# Altium PCB Dashboard_11_19.PcbDoc
Units mm, origin at the board's own origin, x right, y up, seen from the top; angles counter-clockwise.
Board outline 229.62 x 73.66 mm, 2 copper layers (Top Layer, Bottom Layer), stack 0.533 mm thick; 59 components, 48 nets, 205 pads, 36 vias.
Unrouted connection lines stored in the file: 11.
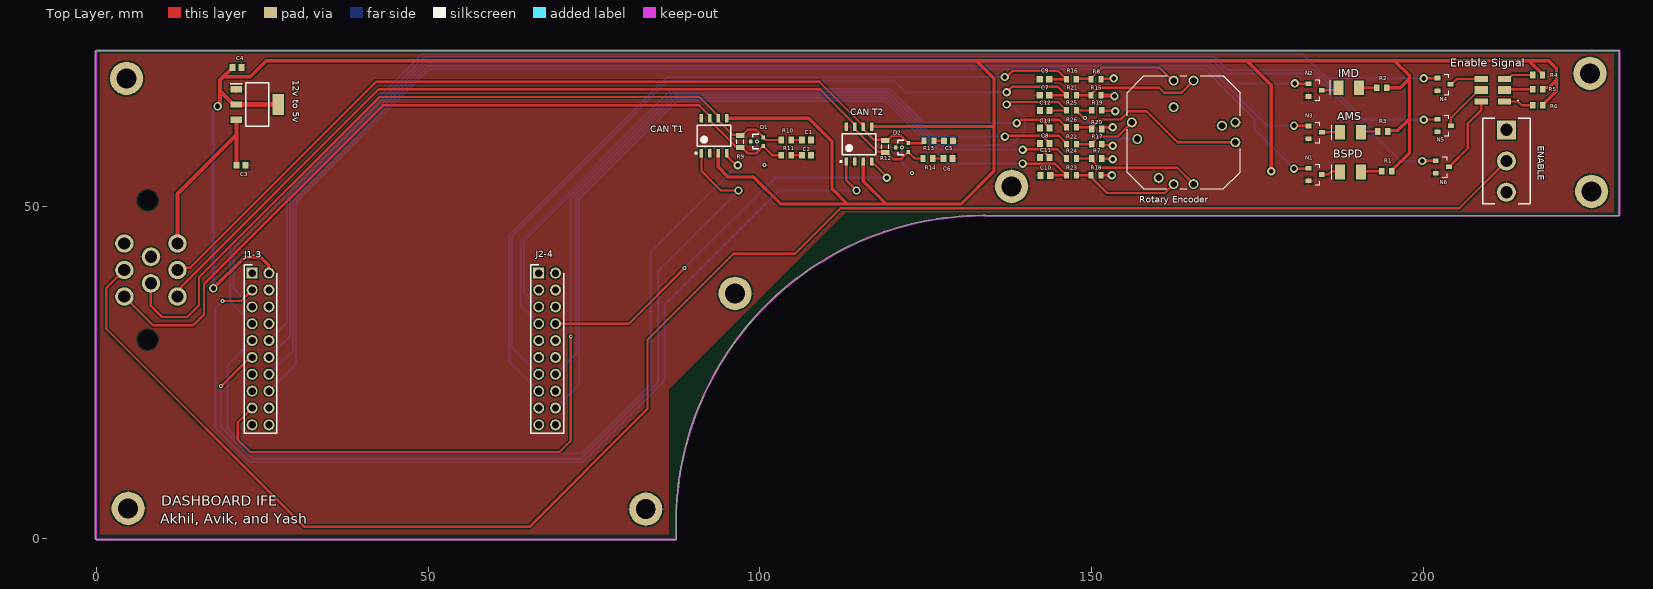
[diagram p0: Top Layer view]
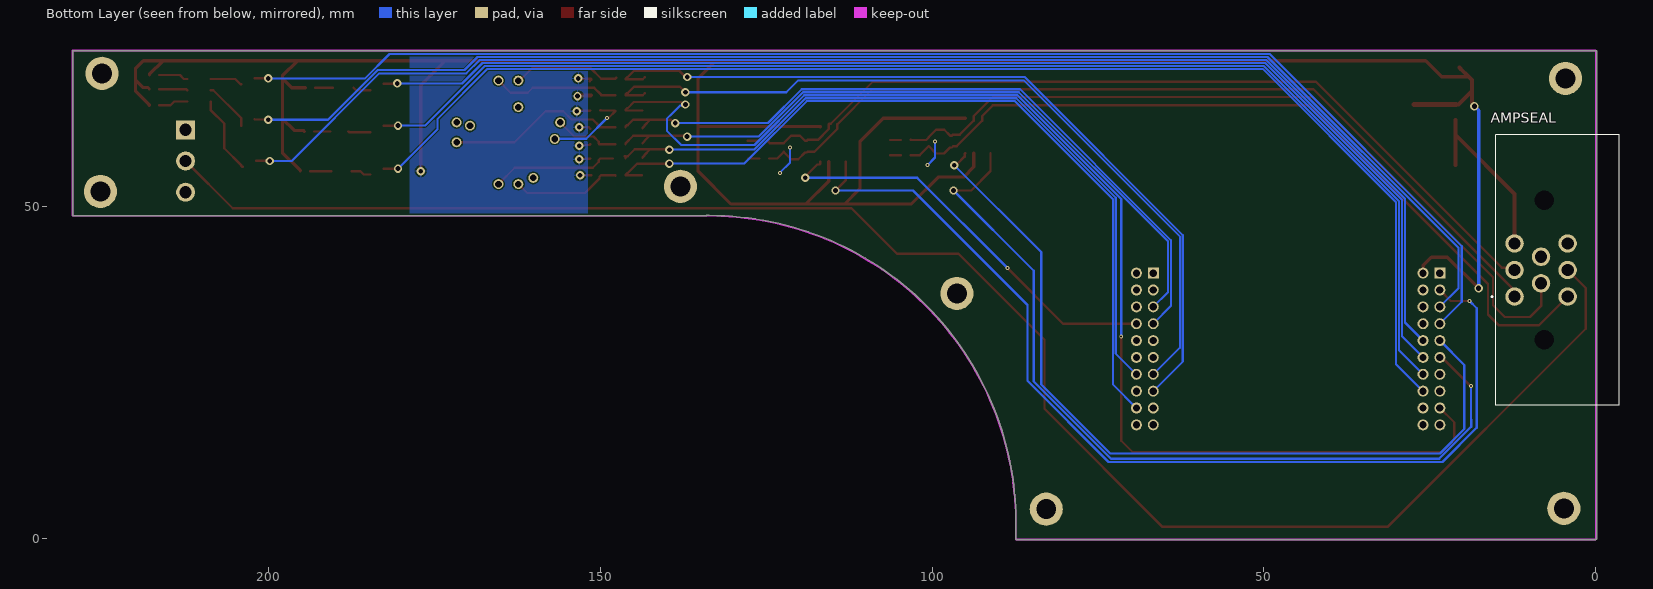
[diagram p1: Bottom Layer view, seen from below]
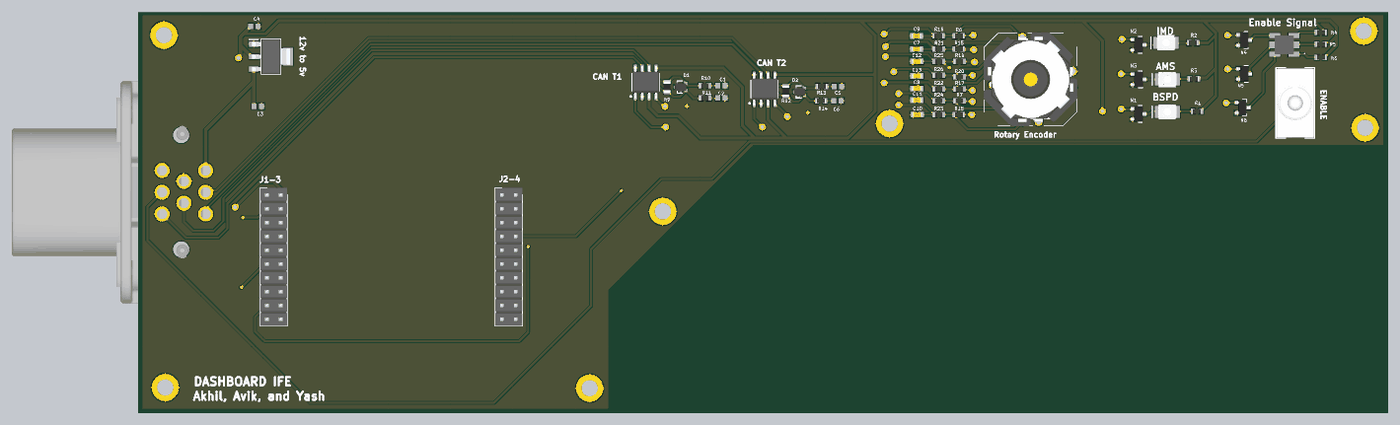
[diagram p2: 3D render of the assembled board from above, using the file's embedded part models]

## Layer stack, top to bottom
Top Solder: solder mask 0.0102, Solder Resist, Dk 3.5
Top Layer: signal copper 0.0356
Dielectric 2: prepreg 0.0711, PP-006, Dk 4.1
Dielectric 1: dielectric 0.32, FR-4, Dk 4.8
Dielectric 3: prepreg 0.0711, PP-006, Dk 4.1
Bottom Layer: signal copper 0.0356
Bottom Solder: solder mask 0.0102, Solder Resist, Dk 3.5

## Board outline
133.985,48.69 134.034,48.641 134.493,48.641 229.489,48.641 229.489,73.533 ccw(c229.489,73.533) 229.489,73.533 0,73.533 ccw(c0,73.406) -0.127,73.406 -0.127,0 ccw(c0,0) 0,-0.127 87.28,-0.127 ccw(c87.28,0) 87.377,-0.083 87.377,2.325 cw(c133.543,2.523) 133.582,48.69 ccw(c133.583,48.714) 133.583,48.69

## Design rules (kind name [scope] priority, off if disabled: settings)
Clearance [All] p1: gap=0.2 ignorepadtopadclearanceinfootprint=FALSE except(0: Arc-Hole Track-Hole SMDPad-Hole THPad-Hole Via-Hole Fill-Hole Poly-Hole Region-Hole Text-Hole; 0.127: Arc-Arc Arc-Track Track-Track; 0.254: Arc-Via Track-Via; 0.33: Arc-THPad Track-THPad)
Height [All] p1: minheight=0 maxheight=28 prefheight=12.7
PolygonConnect [All] p1: connectstyle=Relief reliefconductorwidth=0.254 reliefentries=4 polygonreliefangle="90 Angle" airgapwidth=0.254
RoutingVias [All] p1: holewidth=0.711 width=1.27 viastyle="Through Hole" minholewidth=0.711 minwidth=1.27 maxholewidth=0.711 maxwidth=1.27
SolderMaskExpansion [All] p1: expansion=0.102 istentingtop=FALSE
UnRoutedNet [All] p1: checkbadconnections=TRUE
Width [All] p1: maxlimit=0.762 minlimit=0.254 preferedwidth=0.5 toplayer_prefwidth=0.35 minimp=50.000000 maximp=50.000000 favimp=50.000000
28 further rules are at their usual default settings.

## Classes and differential pairs
component class DASH_CAN: C1 C2 C5 C6 "CAN T1" "CAN T2" D1 D2 R9 R10 R11 R12 R13 R14

## Components (designator, comment, footprint, x,y, rotation, side; value= is the part's Value field where it differs from the comment)
"12v to 5v" "SPX1117M3-L-5-0" SOT230P700X170-4N 24.257,65.405 r0 top
AMPSEAL "1-776279-1" 17762791 12.247,36.472 r90 bottom
AMS "XZMDK45S" LED_XZFBB45S 188.976,61.214 r180 top
BSPD "XZMDK45S" LED_XZFBB45S 188.976,55.245 r180 top
C1 "560p" CAPC1608X87X35NL15T15 107.021,60.071 r180 top
C2 "560p" CAPC1608X87X35NL15T15 107.021,57.785 r180 top
C3 "4.7 uf" CAPC1608X87X35NL15T15 21.844,56.261 r180 top
C4 "2.2 uf" CAPC1608X87X35NL15T15 21.209,70.993 r180 top
C5 "560p" CAPC1608X87X35NL15T15 128.437,59.944 r180 top
C6 "560p" CAPC1608X87X35NL15T15 128.357,57.277 r180 top
C7 "10n" CAPC1608X90X35ML10T15 142.875,66.802 r0 top
C8 "10n" CAPC1608X90X35ML10T15 142.912,59.563 r0 top
C9 "10n" CAPC1608X90X35ML10T15 142.875,69.215 r0 top
C10 "10n" CAPC1608X90X35ML10T15 143.002,54.737 r0 top
C11 "10n" CAPC1608X90X35ML10T15 142.912,57.404 r0 top
C12 "10n" CAPC1608X90X35ML10T15 142.912,64.516 r0 top
C13 "10n" CAPC1608X90X35ML10T15 142.912,61.849 r0 top
"CAN T1" "SN65HVD256DR" D0008A_L 93.091,60.706 r90 top
"CAN T2" "SN65HVD256DR" D0008A_L 114.935,59.436 r90 top
D1 "PESD1CAN-UX" FP-SOT323-MFG 99.568,59.817 r180 top
D2 "PESD1CAN-UX" FP-SOT323-MFG 121.412,58.928 r180 top
ENABLE "A101SYCB04" FP-A101SYCB04-MFG 212.471,56.896 r0 top
"Enable Signal" "XZFBBM2ACRDG92W-3" XZFBBM2ACRDG92W3 210.439,67.564 r180 top
IMD "XZMDK45S" LED_XZFBB45S 188.722,67.945 r180 top
J1-3 "TSW-110-07-G-D-LL" HDRV20W64P254_2X10_2540X495X838P 23.495,40.005 r270 top locked
J2-4 "TSW-110-07-G-D-LL" HDRV20W64P254_2X10_2540X495X838P 66.675,40.005 r270 top locked
N1 "NMOS-SOT23" SOT23 183.642,54.864 r270 top
N2 "NMOS-SOT23" SOT23 183.642,67.564 r270 top
N3 "NMOS-SOT23" SOT23 183.658,61.214 r270 top
N4 "NMOS-SOT23" SOT23 203.073,68.453 r270 top
N5 "NMOS-SOT23" SOT23 203.089,62.23 r270 top
N6 "NMOS-SOT23" SOT23 202.819,56.007 r270 top
R1 "200" RESC1608X55X25ML10T15 194.425,55.372 r0 top
R2 "200" RESC1608X55X25ML10T15 193.687,67.945 r0 top
R3 "200" RESC1608X55X25ML10T15 193.826,61.341 r0 top
R4 "200" RESC1608X55X25ML10T15 217.158,69.85 r0 top
R5 "120" RESC1608X55X25ML10T15 217.17,67.691 r0 top
R6 "120" RESC1608X55X25ML10T15 217.17,65.278 r0 top
R7 "5000" RESC1608X55X25ML10T15 150.749,57.277 r0 top
R8 "5000" RESC1608X55X25ML10T15 150.622,69.215 r0 top
R9 "0805" RESC0805(2012)_L 97.028,59.818 r270 top value="120 o"
R10 "100" RESC1608X55X25ML10T15 103.973,60.071 r180 top
R11 "100" RESC1608X55X25ML10T15 103.973,57.785 r180 top
R12 "0805" RESC0805(2012)_L 118.872,59.055 r270 top value="120 o"
R13 "100" RESC1608X55X25ML10T15 125.476,59.944 r180 top
R14 "100" RESC1608X55X25ML10T15 125.309,57.277 r180 top
R15 "5000" RESC1608X55X25ML10T15 150.622,66.802 r0 top
R16 "10K" RESC1608X55X25ML10T15 146.927,69.215 r180 top
R17 "5000" RESC1608X55X25ML10T15 150.749,59.436 r0 top
R18 "5000" RESC1608X55X25ML10T15 150.622,54.737 r0 top
R19 "5000" RESC1608X55X25ML10T15 150.749,64.516 r0 top
R20 "5000" RESC1608X55X25ML10T15 150.749,61.722 r0 top
R21 "10K" RESC1608X55X25ML10T15 146.939,66.802 r180 top
R22 "10K" RESC1608X55X25ML10T15 146.939,59.436 r0 top
R23 "10K" RESC1608X55X25ML10T15 146.939,54.737 r0 top
R24 "10K" RESC1608X55X25ML10T15 146.939,57.277 r0 top
R25 "10K" RESC1608X55X25ML10T15 146.951,64.516 r180 top
R26 "10K" RESC1608X55X25ML10T15 146.939,61.976 r0 top
"Rotary Encoder" "RKJXT1F42001" RKJXT1F42001 163.83,61.214 r270 top

## Footprints (in the part's own frame and the unit in brackets; to place one, negate y for a bottom-side part, rotate by r counter-clockwise, add the part's x,y. Pads: shape width x height; smd on the part's side, far side on the other; paste and mask are expansions set on the pad)
17762791 [mm]
  round 2.775 hole 1.85: 1(0,0) 2(4,0) 3(8,0) 4(2,-4) 5(6,-4) 6(0,-8) 7(4,-8) 8(8,-8)
  round 1.465 hole 2.93 unplated: MH1(-6.5,-4.5) MH2(14.5,-4.5)
  silkscreen extent -16.4,-15.8 24.4,3.5, body extent -16.4,-35.6 24.4,2.2, height 27.85
CAPC1608X87X35NL15T15 [mm] "Chip Capacitor, 2-Leads, Body 1.60x0.80mm, IPC Medium Density"
  rect 0.9x1 smd: 1(-0.675,0) 2(0.675,0)
  body extent -0.87,-0.48 0.87,0.47, height 0.87
CAPC1608X90X35ML10T15 [mm] "Chip Capacitor, 2-Leads, Body 1.7x0.9mm, IPC Low Density"
  rect 0.95x1.05 smd: 1(-0.725,0) 2(0.725,0)
  body extent -0.85,-0.45 0.85,0.45, height 0.9
D0008A_L [mm] "SOIC, 8-Leads, Body 5x4mm, Pitch 1.27mm, IPC High Density"
  rrect18% 1.25x0.55 smd: 1(-2.625,1.905) 2(-2.625,0.635) 3(-2.625,-0.635) 4(-2.625,-1.905) 5(2.625,-1.905) 6(2.625,-0.635) 7(2.625,0.635) 8(2.625,1.905)
  silkscreen extent -2.75,-2.5 1.6,2.85, body extent -3,-2.45 3,2.45, height 1.63
FP-A101SYCB04-MFG [mil]
  rect 112.37x112.37 hole 73 paste-39370.1 mask+0: 1(0,185)
  round 112.37 hole 73 paste-39370.1 mask+0: 2(0,0) 3(0,-185)
  silkscreen extent -140,-255 140,255, body extent -144,-259 144,259, height 10
FP-SOT323-MFG [mm]
  rect 0.55x0.6 smd paste-1000 mask+0: 1(-0.925,0.65) 2(-0.925,-0.65) 3(0.925,0)
  silkscreen extent -0.28,-1.1 0.67,1.1, body extent -1.33,-1.2 1.33,1.2, height 0.25
HDRV20W64P254_2X10_2540X495X838P [mm]
  rect 1.65x1.65 hole 1.1: 1(0,0)
  round 1.65 hole 1.1: 2(0,2.54) 3(2.54,0) 4(2.54,2.54) 5(5.08,0) 6(5.08,2.54) 7(7.62,0) 8(7.62,2.54) 9(10.16,0) 10(10.16,2.54) 11(12.7,0) 12(12.7,2.54) 13(15.24,0) 14(15.24,2.54) 15(17.78,0) 16(17.78,2.54) 17(20.32,0) 18(20.32,2.54) 19(22.86,0) 20(22.86,2.54)
  silkscreen extent -1.27,-1.2 24.13,3.74, body extent -1.27,-1.2 24.13,3.74, height 8.38
LED_XZFBB45S [mm]
  rect 1.5x2.2 smd: A(-1.55,0) K(1.55,0)
  silkscreen extent 2.8,-1.1 2.8,1.1, body extent -1.75,-1.4 1.75,1.4, height 1.9
RESC0805(2012)_L [mm] "Chip Resistor, Body 2.0x1.3mm, IPC High Density"
  rrect25% 0.76x1.3 smd: 1(-0.9,0) 2(0.89,0)
  silkscreen extent -0.3,-0.55 0.3,0.55, body extent -1,-0.62 1,0.63, height 0.6
RESC1608X55X25ML10T15 [mm] "Chip Resistor, 2-Leads, Body 1.70x0.90mm, IPC Low Density"
  rect 0.8x1 smd: 1(-0.75,0) 2(0.75,0)
  body extent -0.85,-0.45 0.85,0.45, height 0.55
RKJXT1F42001 [mm]
  round 1.5 hole 1: 1(-1.5,-7.8) 2(1,-6.98) 3(6.86,-3.75) 4(7.8,-1.5) 5(7.8,1.5) 6(1.5,7.8) 7(-1,5.78) 8(-1.5,7.8) 9(-7.8,1.5) 10(-7.8,-1.5) 11(-3.8,-1.5)
  silkscreen extent -8.5,-8.5 8.5,8.5, body extent -8.6,-8.6 8.6,8.6, height 17.4
SOT23 [mm]
  rect 0.7x0.9 smd: 1(-0.95,-1) 2(0.95,-1) 3(0,1)
  silkscreen extent -1.55,0 1.55,0.71, body extent -1.45,-1.41 1.45,1.41, height 1.5
SOT230P700X170-4N [mm]
  rect 1.75x0.95 smd: 1(-3.15,2.3) 2(-3.15,0) 3(-3.15,-2.3)
  rect 1.75x3.2 smd: 4(3.15,0)
  silkscreen extent -4.03,-3.25 1.75,3.25, body extent -3.5,-3.25 3.5,3.25, height 1.7
XZFBBM2ACRDG92W3 [mm]
  rect 2x0.9 smd: 1(-1.75,1.7) 3(-1.75,-1.7) 4(1.75,1.7) 6(1.75,-1.7)
  rect 2x1.2 smd: 2(-1.75,0) 5(1.75,0)
  silkscreen extent -3.8,1.5 -3.7,1.6, body extent -1.75,-1.75 1.75,1.75, height 1.35

## Part data
"12v to 5v": "Power Supply", Manufacturer_Name=EXAR, Mouser Part Number=701-SPX1117M3-L-5-0, Datasheet Link=https://componentsearchengine.com/Datasheets/1/SPX1117M3-L-5-0.pdf, Height=1.7mm, Manufacturer_Part_Number=SPX1117M3-L-5-0
AMPSEAL: "Connector", Manufacturer_Name="TE Connectivity", Mouser Part Number=571-1-776279-1, Arrow Part Number=1-776279-1, Arrow Price/Stock=https://www.arrow.com/en/products/1-776279-1/te-connectivity, Datasheet Link=https://www.te.com/commerce/DocumentDelivery/DDEController?Action=showdoc&DocId=Customer+Drawing%7F776279%7FF7%7Fpdf%7FEnglish%7FENG_CD_776279_F7.pdf%7F1-776279-1, Height=32.1mm, Manufacturer_Part_Number=1-776279-1, Mouser Price/Stock=https://www.mouser.co.uk/ProductDetail/TE-Connectivity/1-776279-1?qs=tLAa1RwIH6fAW8GUe6Xfuw%3D%3D
AMS BSPD IMD: library part CMP-009-000234-1, Design Item ID=LED_XZFBB45S, Source=ife19_Elec_Library.schlib
C1 C2 C3 C4 C5 C6: library part CMP-2006-03887-1, ".1 uf", Manufacturer=Kemet, Part Number=C0603C104J3RAC7867
C7 C8 C9 C10 C11 C12 C13: library part CMP-2100-03642-1, "Chip Capacitor, 10 nF, +/- 10%, 50 V, -55 to 125 degC, 0603 (1608 Metric), RoHS, Tape and Reel", Capacitance=10nF, Case Code (Imperial)=0603, Case Code (Metric)=1608, Dielectric=X7R, Dielectric Material=Ceramic, Insulation Resistance=10GR, Manufacturer=Murata, Max Operating Temperature=125degC, Min Operating Temperature=-55degC, Package Description="2-Pin Surface Mount Device, Body 1.6 x 0.8 mm", Package Quantity=1, Tolerance=10%, Voltage=50V, Case/Package=0603, Datasheet URL=http://search.murata.co.jp/Ceramy/image/img/A01X/G101/ENG/GRM188R71H103KA01-01.pdf, Datasheet Version=42401.0, Depth=0.8mm, Height=0.8mm, Lead Free=LeadFree, Length=1.6mm, Manufacturer URL=http://www.murata.com/, Material=Ceramic, Mount=SurfaceMount, Number of Pins=2, Package Reference=0603, Packaging=TapeandReel, REACH SVHC=Unknown, RoHSCompliant=True, Termination=SMD/SMT, Thickness=0.035inch, Voltage Rating=50V, Voltage Rating (DC)=50V, Width=0.031inch
"CAN T1" "CAN T2": library part CMP-0315-00070-2, "CAN Transceiver with Fast Loop Times for Highly Loaded Networks, 85 mA, 5 V, -40 to 125 degC, 8-pin SOIC (D), Green (RoHS & no Sb/Br)", Bus Fault Voltage(V)="-27 to 40", Drivers Per Package=1, Manufacturer="Texas Instruments", Rating=Catalog, Supply Voltage(s)(V)=5, Code_JEDEC=MS-012AA, ComponentLink1Description=Datasheet, ComponentLink1URL=http://www.ti.com/general/docs/lit/getliterature.tsp?genericPartNumber=SN65HVD256&fileType=pdf, DatasheetVersion=SLLSEA2, Eco-Plan="Green (RoHS & no Sb/Br)", Features="Short prop delay, Fast loop times, RXD supply input", ICC(Max)(mA)=85, Isolated=No, Mounting Technology="Surface Mount", PackageDescription="8-Pin Plastic Small Outline Integrated Circuit, 4.9 x 3.9 mm, Pitch 1.27 mm Pitch", PackageReference=D0008A, PackageVersion="revM, Jun-2011", PartNumber=SN65HVD256DR, Receivers Per Package=1, SubFamily=CAN
D1 D2: library part CMP-14436-000006-1, "TVS DIODE 24V 50V SC70-3"
ENABLE: library part CMP-03408-000017-1, "SWITCH TOGGLE SPDT 0.4VA 20V", Actuator Color=Chrome, Contact Current Rating=400mA, Contact Resistance=10mR, Flammability Rating="UL94 V-1", Insulation Resistance=30MR, Max Operating Temperature=85°C, Max Voltage Rating (AC)=20V, Min Operating Temperature=-30°C, Package Quantity=100, Power Rating=400mW, Actuator Length=10.41mm, Actuator Material=Phenolic, Actuator Type="Standard Round", Contact Material=Copper, Contact Plating=Gold, Depth=6.86mm, Electrical Life=6000Cycles, ELV=Compliant, Illumination Type=Non-Illuminated, Lead Free="Lead Free", Max Voltage Rating (DC)=20V, Mount=Panel, Number of Poles=1, Number of Positions=2, Orientation=Straight, Packaging=Bulk, Radiation Hardening=No, REACH SVHC="No SVHC", RoHS Compliant=Yes, Series="Gemini A", Switch Function=On-On, Termination="PC Pins", Throw Configuration=SPDT, Voltage Rating (AC)=20V, Voltage Rating (DC)=20V
"Enable Signal": "LED", Manufacturer_Name=SunLED, Datasheet Link=https://www.sunledusa.com/products/spec/XZFBBM2ACRDG92W-3.pdf, Height=1.25mm, Manufacturer_Part_Number=XZFBBM2ACRDG92W-3
J1-3 J2-4: "Connector", Manufacturer_Name=SAMTEC, Mouser Part Number=200-TSW11007GDLL, Arrow Part Number=TSW-110-07-G-D-LL, Arrow Price/Stock=https://www.arrow.com/en/products/tsw-110-07-g-d-ll/samtec?region=nac, Datasheet Link=http://suddendocs.samtec.com/catalog_english/tsw_th.pdf, Height=8.38mm, Manufacturer_Part_Number=TSW-110-07-G-D-LL, Mouser Price/Stock=https://www.mouser.co.uk/ProductDetail/Samtec/TSW-110-07-G-D-LL?qs=rU5fayqh%252BE1TEdajvGip9g%3D%3D
N1 N2 N3 N4 N5 N6: library part CMP-009-000226-1, Design Item ID=NMOS-SOT23, Source=ife19_Elec_Library.schlib
R1 R2 R3 R4 R5 R6 R7 R8 R10 R11 R13 R14 R15 R16 R17 R18 R19 R20 R21 R22 R23 R24 R25 R26: library part CMP-009-000010-1, "Chip Resistor, 0 Ohm, 0.1 W, -55 to 155 degC, 0603 (1608 Metric)", Design Item ID=CMP-009-00006-4, Source="Integrated_Library - 12.03.21 - 15.39.SchLib"
R9: library part CMP-009-000170-1, "Chip Resistor, 4,7 Ohms, +/-5 %, 125 mW, -55 to 155 degC, 0805", Max Operating Temperature=, Available Preview Images=2D, Design Item ID=CMP-009-00174-2, Source="Integrated_Library - 12.03.21 - 15.39.SchLib"
R12: library part CMP-009-000170-1, "Chip Resistor, 4,7 Ohms, +/-5 %, 125 mW, -55 to 155 degC, 0805", Available Preview Images=2D, Design Item ID=CMP-009-00174-2, Source="Integrated_Library - 12.03.21 - 15.39.SchLib"
"Rotary Encoder": "Switch", Manufacturer_Name=ALPS, Mouser Part Number=688-RKJXT1F42001, Datasheet Link=http://www.alps.com/prod/info/E/HTML/MultiControl/Switch/RKJXT/RKJXT1F42001.html, Height=17mm, Manufacturer_Part_Number=RKJXT1F42001, Mouser Price/Stock=https://www.mouser.co.uk/ProductDetail/ALPS/RKJXT1F42001?qs=6EGMNY9ZYDTsBzSTrhiL0w%3D%3D

## Free pads (board coordinates)
  round 5 hole 3: 3(82.804,4.445) 4(96.266,36.957) 4(137.922,53.086) 5(225.298,52.324) 6(225.044,70.104) 7(4.572,69.342) 8(4.826,4.572)

## Via types
v1: diameter 1.27, hole 0.711, Top Layer to Bottom Layer, 25 vias
v2: diameter 0.6, hole 0.3, Top Layer to Bottom Layer, 9 vias
v3: diameter 1.27, hole 0.77, Top Layer to Bottom Layer, 2 vias

## Nets (pads, with @x,y where several pads share a name; then routed paths per layer and width w, separated by ;. In a path a pad name is that pad's centre, name@x,y a point inside that pad or via, vN(x,y) a via of type N, cw(c..) or ccw(c..) an arc to the next point about the centre after c; other vN are vias at no path point)
+5: "12v to 5v.2" "12v to 5v.4" "CAN T1.3" "CAN T1.5" "CAN T2.3" "CAN T2.5" C4.2 J1-3.2 R1.2 R2.2 R3.2 R4.2 R5.2 R6.2 R7.2 R8.2 R15.2 R17.2 R18.2 R19.2 R20.2 | length 448.6
  Top Layer w0.35: R18.2 v1(153.035,54.737) ; R7.2 151.562,57.213 153.099,57.213 v1(153.162,57.15) ; R17.2 151.626,59.309 153.035,59.309 v1(153.162,59.182) ; R20.2 151.499,61.751 151.724,61.976 v1(153.162,61.976) ; R19.2 151.562,64.453 153.48,64.453 v1(153.543,64.389) ; R8.2@151.597,68.925 151.372,69.15 R8.2 151.435,69.278 153.225,69.278 v1(153.289,69.342) ; R1.2 R1.2@195.175,55.472 ; R5.2 217.92,67.736 R5.2@218.145,67.961
  Top Layer w0.5: v3(17.653,37.719) 22.352,42.418 24.765,42.418 25.993,41.19 25.993,40.047 J1-3.2 ; 19.187,69.596 23.241,69.596 25.654,72.009 132.588,72.009 ; 93.726,58.081 93.726,56.007 95.25,54.483 99.06,54.483 103.124,50.419 113.157,50.419 ; 94.996,63.331 107.357,63.331 110.871,59.817 110.871,52.705 113.157,50.419 ; 115.57,56.811 115.57,53.848 118.999,50.419 ; 116.84,62.061 116.84,62.078 116.865,62.103 135.255,62.103 ; v1(177.038,55.372) 177.038,68.326 173.355,72.009 ; R2.2 196.469,67.945 197.866,69.342 ; R3.2 194.739,61.504 196.124,61.504 197.866,63.246 ; R1.2@195.175,55.472 197.866,58.163 197.866,63.246 ; R4.2 217.908,69.95 215.849,72.009 ; R6.2 217.92,65.378 220.021,67.479 220.021,69.137 ; R5.2@218.145,67.961 218.845,67.961 220.021,69.137 ; 113.157,50.419 118.999,50.419 ; 118.999,50.419 130.302,50.419 135.255,55.372 135.255,62.103 ; 132.588,72.009 173.355,72.009 ; 132.588,72.009 135.255,69.342 135.255,62.103 ; 173.355,72.009 195.58,72.009 ; 195.58,72.009 215.849,72.009 ; 195.58,72.009 197.866,69.723 197.866,69.342 ; 197.866,63.246 197.866,69.342 ; 215.849,72.009 218.807,72.009 220.021,70.796 220.021,69.137
  Top Layer w0.6: v3(18.288,65.151) 18.288,65.332 18.669,65.713 18.669,67.189 ; C4.2 20.384,70.843 20.384,70.793 19.187,69.596 18.669,69.078 18.669,67.189 ; 21.107,65.405 20.707,65.405 18.796,67.316 18.669,67.189 ; R15.2 151.435,66.739 153.352,66.739 v1(153.416,66.675)
  Top Layer w0.762: 21.107,65.405 27.407,65.405
  Bottom Layer w0.5: v3(17.653,37.719) 17.653,64.516 v3(18.288,65.151)
+12: "12v to 5v.3" AMPSEAL.3 C3.2 | length 26.9
  Top Layer w0.6: AMPSEAL.3 12.247,51.959 21.107,60.819 ; 21.107,63.105 21.107,60.819 ; C3.2 21.107,56.323 21.107,60.819
AMS_LED_ON: J1-3.14 N3.1 | length 192.8
  Top Layer w0.35: v1(180.467,62.23) 180.5,62.197 182.625,62.197 N3.1
  Bottom Layer w0.32: J1-3.14 29.652,28.382 29.652,50.858 50.013,71.219 167.414,71.219 176.403,62.23 v1(180.467,62.23)
BSPD_LED_ON: J1-3.16 N1.1 | length 198.1
  Top Layer w0.35: v1(180.467,55.753) 180.5,55.72 N1.1@182.642,55.72
  Bottom Layer w0.32: J1-3.16 30.099,26.289 30.099,50.673 50.198,70.772 166.972,70.772 174.498,63.246 174.498,61.722 v1(180.467,55.753)
CAN0_H: "CAN T1.7" AMPSEAL.6 D1.1 R9.2 R11.2 | length 121.6
  Top Layer w0.35: AMPSEAL.6 8.588,32.131 14.605,32.131 16.256,33.782 16.256,38.354 43.18,65.278 90.859,65.278 92.456,63.681 92.456,63.331 92.456,62.981 96.304,59.133 96.823,59.133 R9.2 97.298,58.928 98.187,58.039 99.39,58.039 D1.1@100.493,59.142 ; D1.1 D1.1@100.493,59.142 ; R11.2 101.85,57.785 D1.1@100.493,59.142
CAN0_L: "CAN T1.6" AMPSEAL.4 D1.2 R9.1 R10.2 | length 119.1
  Top Layer w0.35: AMPSEAL.4 8.247,35.06 9.906,33.401 13.716,33.401 15.494,35.179 15.494,39.37 42.672,66.548 90.859,66.548 93.726,63.681 93.726,63.331 93.726,62.981 95.853,60.854 96.892,60.854 R9.1 97.298,60.718 98.175,61.595 99.39,61.595 100.493,60.492 D1.2 100.493,60.442 100.864,60.071 R10.2 R10.2@103.217,60.077
CAN1_H: "CAN T2.7" AMPSEAL.1 D2.1 R12.2 R14.2 | length 131.4
  Top Layer w0.35: AMPSEAL.1 12.711,36.936 12.711,37.857 42.545,67.691 109.02,67.691 114.3,62.411 114.3,62.061 114.3,61.711 117.719,58.292 118.745,58.292 R12.2 119.142,58.165 120.157,57.15 121.234,57.15 D2.1@122.337,58.253 ; D2.1 D2.1@122.337,58.253 ; R14.2 123.313,57.277 D2.1@122.337,58.253
CAN1_L: "CAN T2.6" AMPSEAL.2 D2.2 R12.1 R13.2 | length 129.4
  Top Layer w0.35: AMPSEAL.2 12.605,40.829 14.159,40.829 42.164,68.834 108.928,68.834 115.251,62.511 115.47,62.511 115.57,62.411 115.57,62.061 115.57,61.711 117.199,60.082 118.745,60.082 R12.1 119.142,59.955 119.893,60.706 121.234,60.706 122.337,59.603 D2.2 124.46,59.578 124.657,59.775 R13.2@124.657,60.013
D_1: C7.2 J2-4.13 R21.2 | length 120.4
  Top Layer w0.35: v1(137.16,67.256) 137.988,68.084 144.907,68.084 145.864,67.127 145.964,67.127 146.189,66.902 R21.2 ; C7.2@143.3,67.102 C7.2 146.177,66.802 R21.2@146.189,66.814
  Bottom Layer w0.32: J2-4.13 62.677,28.763 62.677,45.535 86.184,69.042 120.188,69.042 121.974,67.256 v1(137.16,67.256)
ENABLE_SIG: AMPSEAL.7 ENABLE.2 | length 262.2
  Top Layer w0.35: AMPSEAL.7 1.524,37.749 1.524,31.623 31.369,1.778 65.278,1.778 83.058,19.558 83.058,29.972 96.012,42.926 105.283,42.926 112.141,49.784 205.359,49.784 ENABLE.2
ENCODE_A: C9.2 J2-4.15 R16.2 | length 123.1
  Top Layer w0.32: 144.985,70.446 144.985,70.407 145.837,69.555 145.937,69.555 146.177,69.315 R16.2
  Top Layer w0.35: v1(136.899,69.548) 137.148,69.548 138.046,70.446 144.985,70.446 ; C9.2@143.3,69.515 C9.2 R16.2
  Bottom Layer w0.32: J2-4.15 62.23,26.67 62.23,45.72 86.058,69.548 v1(136.899,69.548)
ENCODE_B: C11.2 J2-4.14 R24.1 | length 113.7
  Top Layer w0.35: v1(139.573,58.608) 139.628,58.663 142.458,58.663 ; C11.2 143.337,57.704 143.337,57.784 142.458,58.663 ; R24.1 146.189,57.377 145.964,57.602 145.864,57.602 144.803,58.663 142.458,58.663 ; R24.1@146.245,57.602 R24.1@146.345,57.602
  Bottom Layer w0.32: J2-4.14 72.324,27.874 72.324,51.366 87.318,66.36 119.077,66.36 126.829,58.608 v1(139.573,58.608)
GND: "12v to 5v.1" "CAN T1.2" "CAN T1.8" "CAN T2.2" "CAN T2.8" "Rotary Encoder.3" "Rotary Encoder.7" "Rotary Encoder.8" AMPSEAL.5 C1.1 C2.1 C3.1 C4.1 C5.1 C6.1 C7.1 C8.1 C9.1 C10.1 C11.1 C12.1 C13.1 D1.3 D2.3 ENABLE.3 J2-4.2 N1.2 N2.2 N3.2 N4.2 N5.2 N6.2 pad.3 pad.4 pad.5 pad.6 pad.7 pad.8 | length 8.5
  Bottom Layer w0.35: v2(99.568,59.817) 99.568,57.404 v2(100.711,56.261) ; v2(121.412,58.928) 121.412,56.642 v2(122.936,55.118)
IMD_LED_ON: J1-3.12 N2.1 | length 188.3
  Top Layer w0.35: v1(180.594,68.58) 180.627,68.547 182.609,68.547 N2.1
  Bottom Layer w0.32: J1-3.12 29.205,30.475 29.205,51.043 49.828,71.666 167.729,71.666 170.815,68.58 v1(180.594,68.58)
NetAMS_A: AMS.A R3.1 | length 2.4
  Top Layer w0.35: AMS.A@190.653,61.341 R3.1
NetAMS_K: AMS.K N3.3 | length 3.3
  Top Layer w0.35: N3.3 187.807,61.214 AMS.K@187.934,61.341
NetBSPD_A: BSPD.A R1.1 | length 3.1
  Top Layer w0.35: BSPD.A@190.526,55.372 R1.1
NetBSPD_K: BSPD.K N1.3 | length 3
  Top Layer w0.35: N1.3 185.631,54.864 186.139,55.372 BSPD.K@187.426,55.372
NetC1_2: C1.2 R10.1 | length 1.6
  Top Layer w0.35: R10.1 C1.2
NetC2_2: C2.2 R11.1 | length 1.6
  Top Layer w0.35: R11.1 C2.2
NetC5_2: C5.2 R13.1 | length 1.5
  Top Layer w0.35: R13.1 C5.2
NetC6_2: C6.2 R14.1 | length 1.6
  Top Layer w0.35: R14.1 C6.2
"NetEnable Signal_1": "Enable Signal.1" R6.1 | length 4.5
  Top Layer w0.35: 212.189,65.864 214.174,65.864 214.76,65.278 R6.1
"NetEnable Signal_2": "Enable Signal.2" R5.1 | length 4.3
  Top Layer w0.35: 212.189,67.564 212.316,67.691 R5.1
"NetEnable Signal_3": "Enable Signal.3" R4.1 | length 4.5
  Top Layer w0.35: 212.189,69.264 212.739,69.264 213.325,69.85 R4.1
"NetEnable Signal_4": "Enable Signal.4" N6.3 | length 11.9
  Top Layer w0.35: N6.3 203.919,56.007 204.094,56.182 204.094,56.282 206.629,58.817 206.629,62.532 208.689,64.592 208.689,65.864
"NetEnable Signal_5": "Enable Signal.5" N5.3 | length 7.5
  Top Layer w0.35: N5.3 204.089,63.364 208.289,67.564 208.689,67.564
"NetEnable Signal_6": "Enable Signal.6" N4.3 | length 5
  Top Layer w0.35: N4.3 204.173,68.453 204.984,69.264 208.689,69.264
NetIMD_A: IMD.A R2.1 | length 2.7
  Top Layer w0.35: IMD.A R2.1
NetIMD_K: IMD.K N2.3 | length 2.7
  Top Layer w0.35: N2.3 186.791,67.564 IMD.K
NetR7_1: "Rotary Encoder.5" R7.1 R24.2 | length 19
  Top Layer w0.35: R24.2@148.07,57.277 R7.1 150.224,57.052 150.224,56.786 151.13,55.88 162.864,55.88 165.33,53.414
NetR8_1: "Rotary Encoder.10" R8.1 R16.1 | length 16.2
  Top Layer w0.35: R16.1@147.562,69.469 R16.1@147.626,69.406 ; R16.1@147.753,69.278 149.835,69.278 151.55,70.993 160.147,70.993 162.126,69.014 162.33,69.014
NetR15_1: "Rotary Encoder.9" R15.1 R21.1 | length 19.2
  Top Layer w0.35: R21.1 R15.1 149.872,66.902 150.915,67.945 160.147,67.945 160.909,67.183 163.499,67.183 165.33,69.014
NetR17_1: "Rotary Encoder.1" R17.1 R22.2 | length 9.9
  Top Layer w0.35: R22.2 150.126,59.436 150.224,59.534 150.224,59.8 151.003,60.579 153.895,60.579 156.03,62.714
NetR18_1: "Rotary Encoder.4" R18.1 R23.2 | length 16.6
  Top Layer w0.35: R23.2@147.689,54.637 R23.2 R18.1 150.097,54.512 150.097,54.246 152.273,52.07 160.986,52.07 162.33,53.414
NetR19_1: "Rotary Encoder.2" R19.1 R25.1 | length 13.2
  Top Layer w0.35: v2(148.971,63.373) 148.923,63.421 148.696,63.421 147.701,64.416 147.801,64.516 R19.1@149.872,64.516 ; R19.1@149.935,64.579 R19.1
  Bottom Layer w0.35: v2(148.971,63.373) 152.098,60.246 156.818,60.246 156.85,60.214
NetR20_1: "Rotary Encoder.6" R20.1 R26.2 | length 27
  Top Layer w0.35: R26.2 150.153,61.976 150.224,62.047 150.224,62.172 150.456,62.404 150.456,62.488 151.122,63.155 154.341,63.155 155.575,64.389 158.242,64.389 162.917,59.714 171.63,59.714
PUSH: C12.2 J1-3.17 R25.2 | length 190.5
  Top Layer w0.32: J1-3.17 21.336,17.526 21.336,14.859 23.114,13.081 69.85,13.081 71.501,14.732 v2(71.501,30.48) ; v1(137.16,65.405) 137.417,65.405 137.798,65.786 144.931,65.786 145.861,64.856 145.961,64.856 146.201,64.616 R25.2 C12.2
  Bottom Layer w0.32: v2(71.501,30.48) 71.501,51.175 87.133,66.807 119.262,66.807 126.76,59.309 137.795,59.309 139.954,61.468 139.954,63.246 139.192,64.008 137.946,65.254 137.311,65.254 v1(137.16,65.405)
RGB_BLUE: J1-3.10 N6.1 | length 210.6
  Top Layer w0.35: v1(199.771,56.896) 199.802,56.927 201.788,56.927 N6.1
  Bottom Layer w0.32: J1-3.10 28.758,32.568 28.758,51.228 49.643,72.113 168.171,72.113 170.18,70.104 183.261,70.104 196.469,56.896 v1(199.771,56.896)
RGB_GREEN: J1-3.5 N5.1 | length 207.3
  Top Layer w0.35: v1(200.025,63.119) 200.056,63.15 202.058,63.15 N5.1
  Bottom Layer w0.32: J1-3.5 20.701,37.719 20.701,43.804 49.457,72.56 168.486,72.56 170.434,70.612 183.515,70.612 191.008,63.119 v1(200.025,63.119)
RGB_RED: J1-3.7 N4.1 | length 208.7
  Top Layer w0.35: v1(200.025,69.342) 200.056,69.373 202.042,69.373 N4.1
  Top Layer w0.5: J1-3.7@23.241,32.385 J1-3.7
  Bottom Layer w0.32: J1-3.7 20.193,35.687 20.193,44.069 49.131,73.007 181.752,73.007 185.417,69.342 v1(200.025,69.342)
RXD_0: "CAN T1.4" J1-3.9 | length 125.5
  Top Layer w0.35: 94.996,58.081 95.096,57.981 95.096,57.558 96.217,56.437 96.471,56.437 v1(96.647,56.261)
  Bottom Layer w0.35: J1-3.9 19.812,26.162 19.812,16.51 23.495,12.827 73.152,12.827 83.566,23.241 83.566,43.18 v1(96.647,56.261)
RXD_1: "CAN T2.4" J2-4.8 | length 62.6
  Top Layer w0.35: J2-4.8 80.264,32.385 v2(88.646,40.767) ; 116.84,56.811 116.84,56.461 116.94,56.361 117.29,56.361 119.126,54.525 v1(119.126,54.356)
  Bottom Layer w0.35: v2(88.646,40.767) 102.235,54.356 v1(119.126,54.356)
SWITCH_A: C8.2 J2-4.5 R22.1 | length 106.8
  Top Layer w0.35: v1(136.906,60.579) 137.033,60.706 142.574,60.706 ; C8.2 143.337,59.863 143.337,59.943 142.574,60.706 ; R22.1 146.189,59.536 145.019,60.706 142.574,60.706
  Bottom Layer w0.32: J2-4.5 64.465,37.135 64.465,44.794 86.925,67.254 119.447,67.254 126.122,60.579 v1(136.906,60.579)
SWITCH_B: C10.2 J2-4.18 R23.1 | length 120
  Top Layer w0.35: v1(139.573,56.515) 139.584,56.504 144.422,56.504 R23.1 ; C10.2@143.727,54.787 C10.2 R23.1 ; R23.1@145.964,55.062 146.189,54.837 R23.1
  Bottom Layer w0.32: J2-4.18 72.771,23.241 72.771,51.181 87.503,65.913 118.892,65.913 128.29,56.515 v1(139.573,56.515)
SWITCH_C: C13.2 J2-4.7 R26.1 | length 109.9
  Top Layer w0.35: v1(138.684,62.611) 138.841,62.611 139.349,63.119 142.447,63.119 ; C13.2 143.337,62.149 143.337,62.229 142.447,63.119 ; R26.1 146.189,62.076 145.964,62.301 145.864,62.301 145.046,63.119 142.447,63.119
  Bottom Layer w0.32: J2-4.7 64.018,35.042 64.018,44.979 86.74,67.701 119.633,67.701 124.723,62.611 v1(138.684,62.611)
TXD_0: "CAN T1.1" J1-3.11 | length 128.6
  Top Layer w0.35: v2(18.796,22.987) 18.864,22.987 23.182,27.305 J1-3.11 ; 91.186,58.081 91.186,55.372 94.107,52.451 v1(96.774,52.451)
  Bottom Layer w0.35: v2(18.796,22.987) 18.796,17.938 18.765,17.907 18.765,16.882 23.613,12.034 73.034,12.034 84.678,23.678 84.678,40.355 v1(96.774,52.451)
TXD_1: "CAN T2.1" J1-3.3 | length 152.1
  Top Layer w0.35: v2(19.05,35.814) 21.844,35.814 J1-3.3 ; 113.03,56.811 113.03,53.975 v1(114.554,52.451)
  Bottom Layer w0.35: v2(19.05,35.814) 17.94,34.704 17.94,16.731 23.114,11.557 73.406,11.557 85.632,23.783 85.632,35.213 102.87,52.451 v1(114.554,52.451)
pads on no net: "Rotary Encoder.11" AMPSEAL.8 AMPSEAL.MH1 AMPSEAL.MH2 ENABLE.1 J1-3.1 J1-3.4 J1-3.6 J1-3.8 J1-3.13 J1-3.15 J1-3.18 J1-3.19 J1-3.20 J2-4.1 J2-4.3 J2-4.4 J2-4.6 J2-4.9 J2-4.10 J2-4.11 J2-4.12 J2-4.16 J2-4.17 J2-4.19 J2-4.20

## Polygon pours and split planes (outlines as drawn)
+5 on Bottom Layer "+5_L02_P000" (solid, pour order 0): 178.689,73.406 178.689,49.022 151.892,49.022 151.892,72.898
GND on Top Layer "GND_L01_P002" (solid, pour order 2): 0.635,73.025 228.6,73.025 228.6,49.149 112.903,49.149 86.233,22.479 86.233,0.635 0.635,0.635

## Keep-outs
Keep-Out Layer:
  lines w0.254: 0,-0.127 87.376,-0.127 87.376,2.667 cw(c133.731,2.286) 134.112,48.641 229.489,48.641 229.489,73.533 0,73.533 0,-0.127

## Silkscreen, mask and mechanical layers (free items; w line width, h text height)
Top Overlay:
  text "DASHBOARD IFE" at 9.771,4.945 h1.52
  text "Akhil, Avik, and Yash" at 9.644,2.278 h1.52
Board Outline:
  lines w0.254: 82.042,19.558 105.283,19.558 ; 86.487,19.558 6.731,19.558 ; 6.731,19.558 105.283,19.558 ; 6.731,19.558 6.731,72.898 ; 6.731,19.558 6.731,36.424 6.731,54.945 6.731,60.706 6.731,72.898 ; 6.731,72.898 229.362,72.898 ; 6.731,72.898 229.362,72.898 ; 105.283,19.558 105.283,62.738 ; 105.283,19.558 105.283,48.514 105.283,62.738 ; 105.283,62.738 114.554,62.738 ; 105.283,62.738 114.554,62.738 ; 114.554,55.689 129.921,55.689 ; 114.554,55.689 114.554,62.738 ; 114.554,55.689 129.921,55.689 ; 129.921,48.514 229.362,48.514 ; 129.921,48.514 129.921,55.689 ; 129.921,48.514 129.921,55.689 ; 229.362,48.514 229.362,72.898 ; 229.362,48.514 229.362,72.898

## Dimensions
26.035,17.145 to 66.675,17.145 on Mechanical 16
26.035,17.145 to 66.675,17.145 on Mechanical 16
6.731,36.424 to 229.362,72.898 on Board Outline